# Altium PCB PonEnH.PcbDoc
Units mil, origin at the board's own origin, x right, y up, seen from the top; angles counter-clockwise.
Board outline 6000 x 4000 mil, 2 copper layers (Top Layer, Bottom Layer); 11 components, 7 nets, 36 pads, 0 vias.
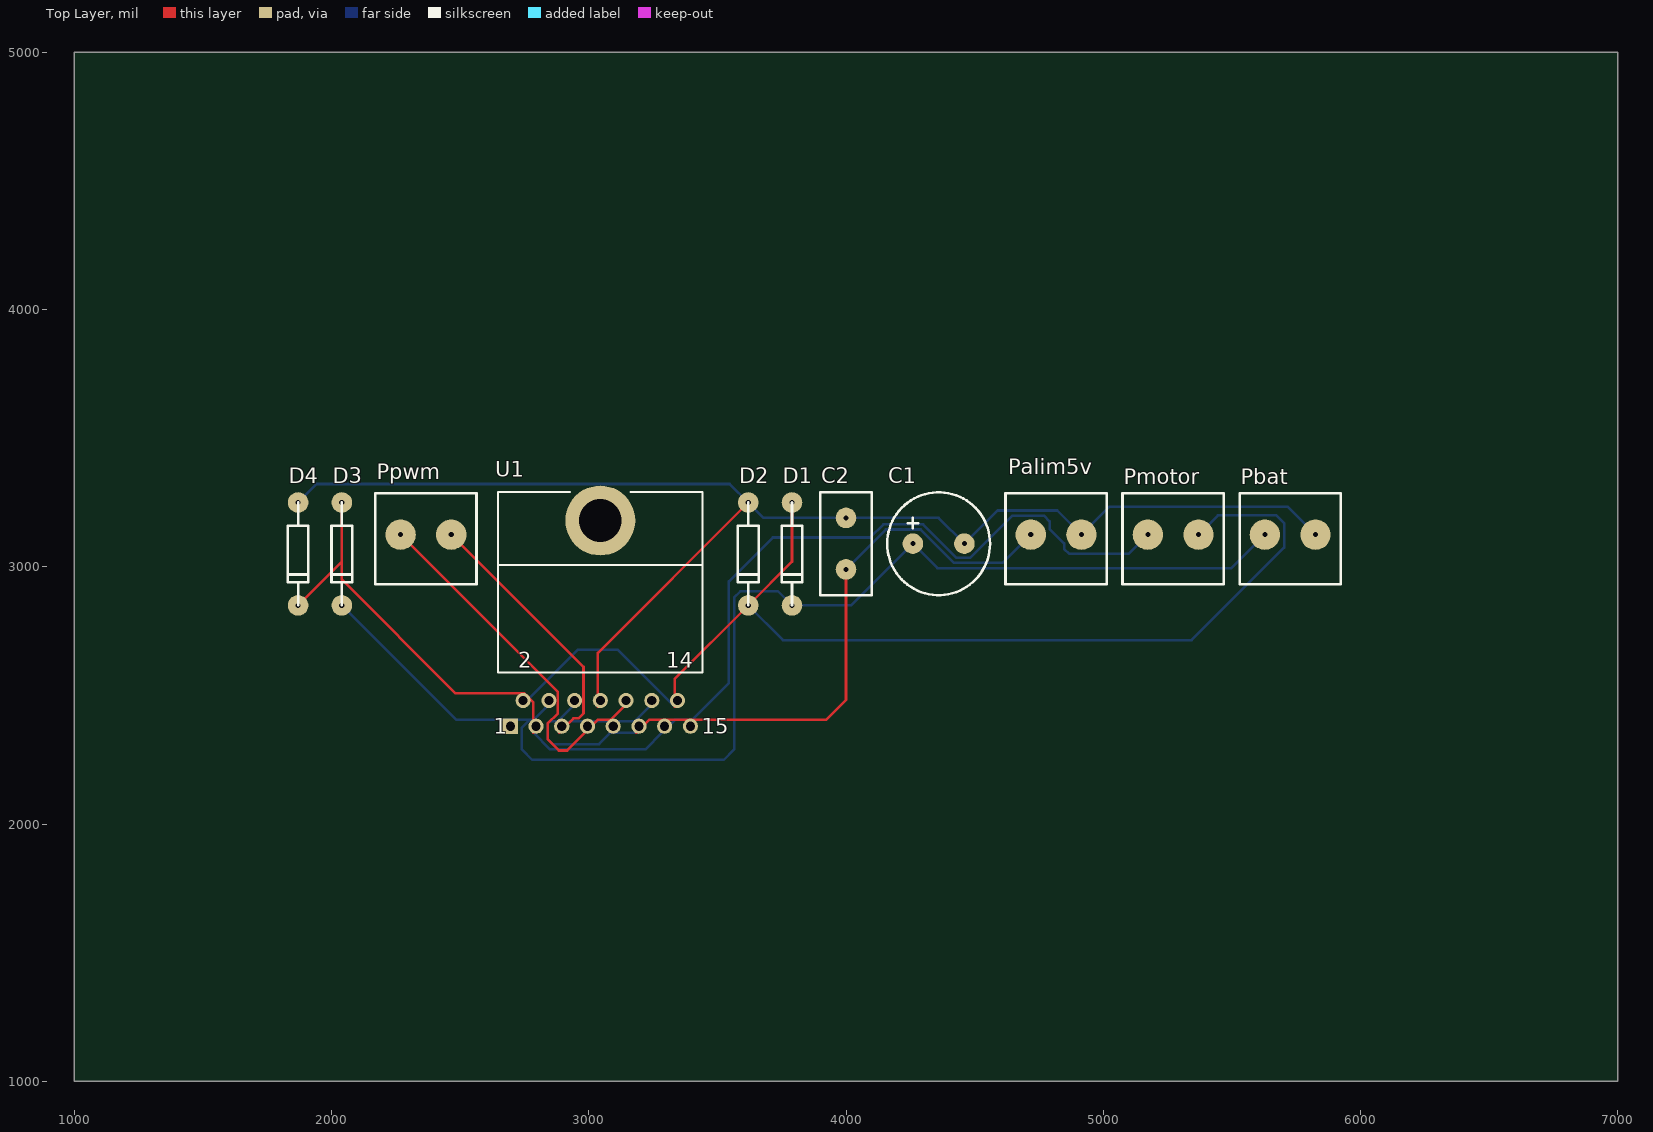
[diagram p0: Top Layer view]
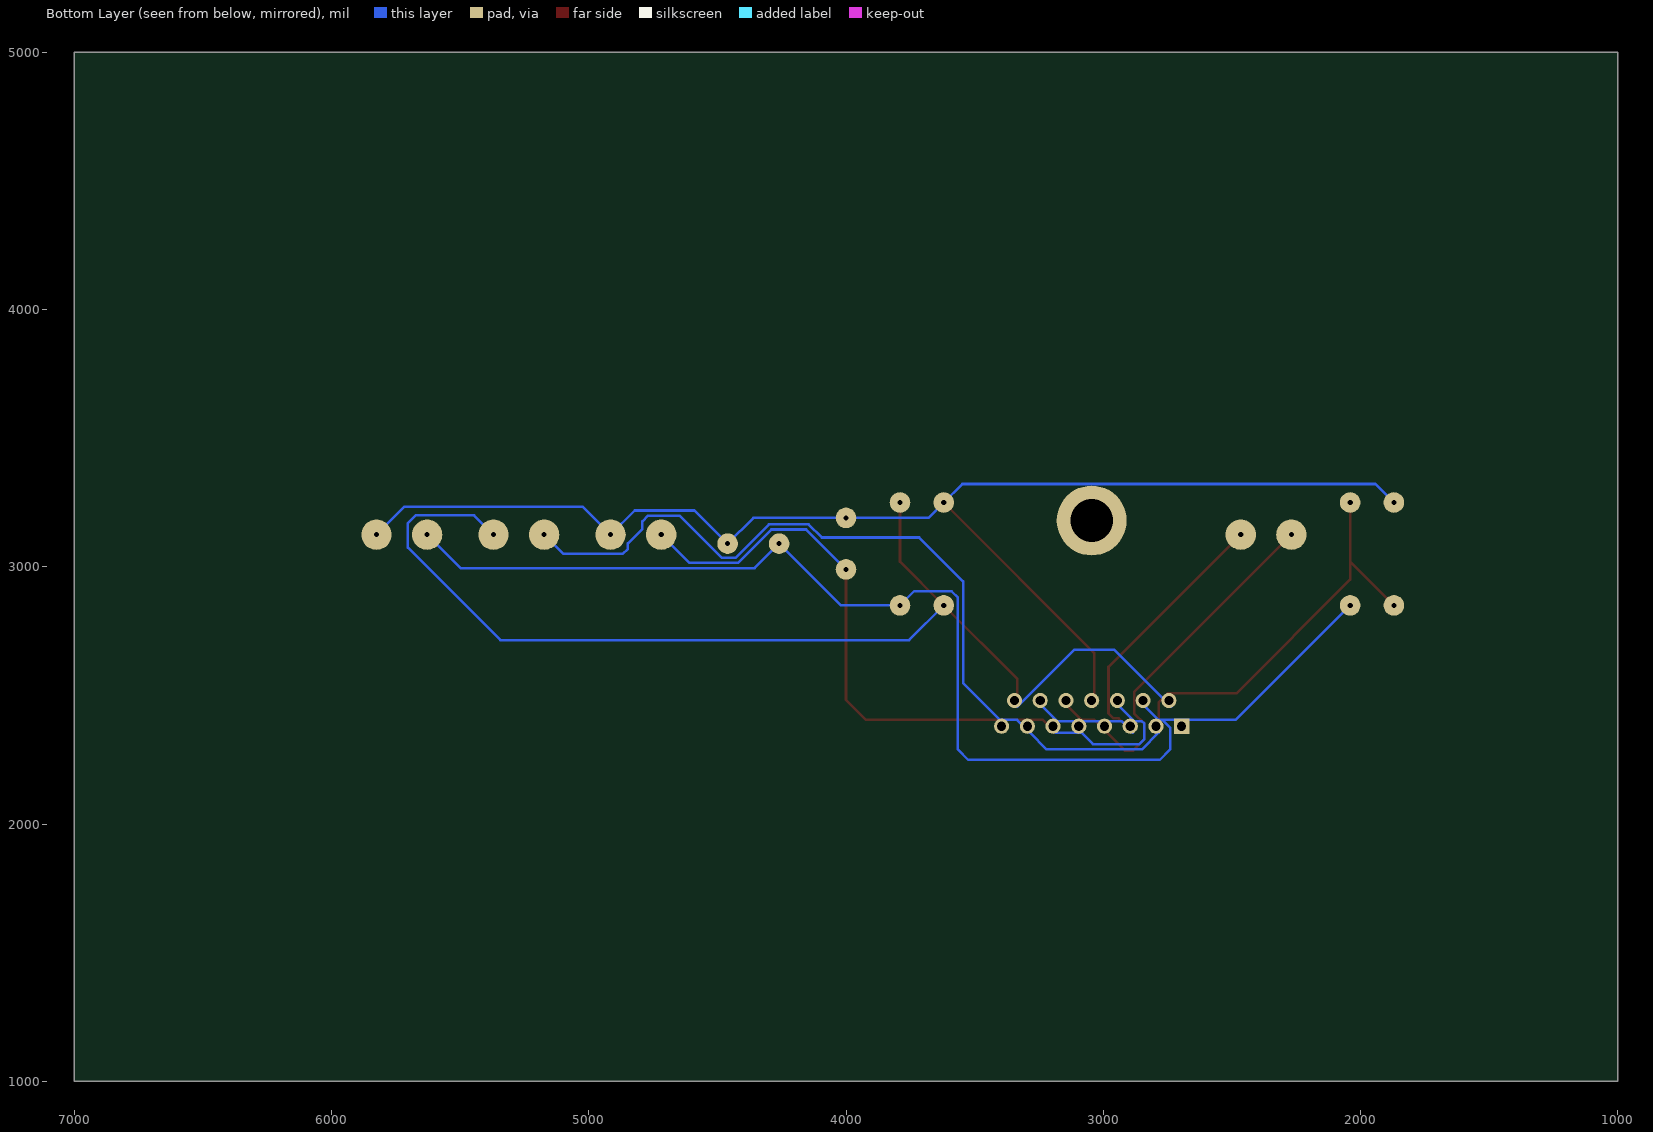
[diagram p1: Bottom Layer view, seen from below]

## Layer stack, top to bottom
Top Layer: signal copper 1.4
Dielectric: dielectric 12.6, FR-4, Dk 4.8
Bottom Layer: signal copper 1.4

## Board outline
1000,1000 7000,1000 7000,5000 1000,5000

## Design rules (kind name [scope] priority, off if disabled: settings)
Clearance [All] p1: gap=10
PolygonConnect [All] p1: connectstyle=Relief reliefconductorwidth=10 reliefentries=4 polygonreliefangle="90 Angle"
RoomDefinition L298 [InComponentClass('L298')] p1: confinementstyle=ConfineIn formatcopy=TRUE lockcomponents=FALSE outline 1815,1095 5965,1095 5965,3745 1815,3745
RoutingVias [All] p1: holewidth=28 width=50 viastyle="Through Hole" minholewidth=28 minwidth=50 maxholewidth=28 maxwidth=50
SilkscreenOverComponentPads [All] p1: minsilkscreentomaskgap=10
SolderMaskExpansion [All] p1: expansion=4
Width [All] p1: maxlimit=10 minlimit=10 preferedwidth=10
27 further rules are at their usual default settings.

## Components (designator, comment, footprint, x,y, rotation, side; value= is the part's Value field where it differs from the comment)
C1 "Cap Pol2" Capa2_pol 4260,3089.8 r0 top
C2 "Cap2" CAPA2 4000,2989.8 r90 top
D1 "Diode 1N4148" Ddiode 3790,2849.8 r90 top
D2 "Diode 1N4148" Ddiode 3620,2849.8 r90 top
D3 "Diode 1N4148" Ddiode 2040,2849.8 r90 top
D4 "Diode 1N4148" Ddiode 1870,2849.8 r90 top
Palim5v "Alim logique" Bornier_2 4620,3124.8 r0 top
Pbat "Batterie" Bornier_2 5530,3124.8 r0 top
Pmotor "Moteur" Bornier_2 5075,3124.8 r0 top
Ppwm "PWM" Bornier_2 2170,3124.8 r0 top
U1 "L298HN" Multiwatt15H 3045,2780 r0 top

## Footprints (in the part's own frame and the unit in brackets; to place one, negate y for a bottom-side part, rotate by r counter-clockwise, add the part's x,y. Pads: shape width x height; smd on the part's side, far side on the other; paste and mask are expansions set on the pad)
Bornier_2 [mm]
  round 3 hole 0.508: 1(2.5,0) 2(7.5,0)
  silkscreen extent 0,-4.9 10,4.1
CAPA2 [mil]
  round 80 hole 20: 1(0,0) 2(200,0)
  silkscreen extent -100,-100 300,100
Capa2_pol [mil]
  round 80 hole 20: 1(0,0) 2(200,0)
  silkscreen extent -100,-200 300,200
Ddiode [mil]
  round 80 hole 20: A(400,0) K(0,0)
  silkscreen extent 0,-40 400,40
Multiwatt15H [mm] "TO, Thru-Hole, Horizontal, Heatsink Mounted; 15 Bent Staggered Leads; Pitch 1.27 mm"
  rect 1.5x1.5 hole 0.9: 1(-8.89,-10.155)
  round 1.5 hole 0.9: 2(-7.62,-7.615) 3(-6.35,-10.155) 4(-5.08,-7.615) 5(-3.81,-10.155) 6(-2.54,-7.615) 7(-1.27,-10.155) 8(0,-7.615) 9(1.27,-10.155) 10(2.54,-7.615) 11(3.81,-10.155) 12(5.08,-7.615) 13(6.35,-10.155) 14(7.62,-7.615) 15(8.89,-10.155)
  round 6.9 hole 4.2: 16(0,10.155)
  silkscreen extent -10.1,-4.84 10.1,12.96

## Part data
C1: "Polarized Capacitor (Radial)"
C2: "Capacitor"
D1 D2 D3 D4: "High Conductance Fast Diode"
Palim5v Pbat Pmotor Ppwm: library part Bornier_2, "Header, 2-Pin"
U1: "Dual Full Bridge Driver"

## Nets (pads, with @x,y where several pads share a name; then routed paths per layer and width w, separated by ;. In a path a pad name is that pad's centre, name@x,y a point inside that pad or via, vN(x,y) a via of type N, cw(c..) or ccw(c..) an arc to the next point about the centre after c; other vN are vias at no path point)
GND: C1.2 C2.2 D2.A D4.A Palim5v.2 Pbat.2 U1.8 | length 5301.3
  Top Layer w10: U1.8@3035,2455 3035,2664.8 D2.A
  Bottom Layer w10: D4.A 1942,3321.8 3548,3321.8 D2.A 3680,3189.8 C2.2 4360,3189.8 C1.2 4589.06,3218.86 4821.22,3218.86 Palim5v.2 5024.55,3234.08 5716,3234.08 Pbat.2
MOTOR1: D1.A D2.K Pmotor.2 U1.2 U1.14 | length 4526.3
  Top Layer w10: U1.14@3335,2455 3335,2564.8 D2.K 3790,3019.8 D1.A
  Bottom Layer w10: U1.2@2735,2455 2956.8,2676.8 3113.2,2676.8 U1.14@3335,2455 ; D2.K 3755,2714.8 5343,2714.8 5703,3074.8 5703,3169.8 5673,3199.8 5445.28,3199.8 Pmotor.2
MOTOR2: D3.A D4.K Pmotor.1 U1.3 U1.13 | length 4853.4
  Top Layer w10: D4.K 2040,3019.8 ; D3.A 2040,3019.8 ; U1.3@2785,2355 2785,2472.8 2750,2507.8 2482,2507.8 2040,2949.8 2040,3019.8
  Bottom Layer w10: U1.3@2785,2355 2849.53,2290.47 3220.47,2290.47 3285,2355 3334.8,2404.8 3401,2404.8 3545,2548.8 3545,2942.8 3716,3113.8 4094,3113.8 4145,3164.8 4300,3164.8 4430,3034.8 4482.78,3034.8 4646.84,3198.86 4770,3198.86 4792,3176.86 4792,3146.8 4848,3090.8 4848,3069.8 4868,3049.8 5098.43,3049.8 Pmotor.1
NetPpwm_1: Ppwm.1 U1.7 U1.10 | length 1447.8
  Top Layer w10: Ppwm.1 2879.53,2513.7 2879.53,2429.8 2840,2390.27 2840,2329.8 2884,2285.8 2915.8,2285.8 2985,2355 3034.8,2404.8 3084.8,2404.8 U1.10@3135,2455
NetPpwm_2: Ppwm.2 U1.5 U1.12 | length 1424.9
  Top Layer w10: Ppwm.2 2979.53,2610.55 2979.53,2429.8 2960.2,2410.47 2940.47,2410.47 U1.5@2885,2355
  Bottom Layer w10: U1.5@2885,2355 2929.8,2399.8 3179.8,2399.8 U1.12@3235,2455
VBAT: C1.1 D1.K D3.K Pbat.1 U1.4 | length 4864.9
  Bottom Layer w10: D3.K 2485,2404.8 2770,2404.8 ; U1.4@2835,2455 2784.8,2404.8 2770,2404.8 ; Pbat.1 5498.43,2994.8 4355,2994.8 C1.1 4020,2849.8 D1.K 3735,2904.8 3590,2904.8 3565,2879.8 3565,2289.8 3525,2249.8 2780,2249.8 2740,2289.8 2740,2374.8 2770,2404.8
VCC: C2.1 Palim5v.1 U1.6 U1.9 U1.11 | length 2809.5
  Top Layer w10: U1.11@3185,2355 3234.8,2404.8 3922,2404.8 4000,2482.8 C2.1
  Bottom Layer w10: U1.6@2935,2455 2879.8,2399.8 2850.47,2399.8 2840.47,2389.8 2840.47,2329.8 2859.8,2310.47 3040.47,2310.47 3085,2355 U1.11@3185,2355 ; C2.1 4155,3144.8 4290,3144.8 4420,3014.8 4608.43,3014.8 Palim5v.1
pads on no net: U1.1 U1.15 U1.16

## Text inside footprints (layer, text, board x,y; h text height)
U1: Top Overlay "2" at 2725.31,2607.95 h59.06; Top Overlay "14" at 3300.71,2607.95 h59.06; Top Overlay "15" at 3439.29,2350.67 h59.06; Top Overlay "1" at 2631.02,2350.67 h59.06